# Altium PCB JUNORPCFtoF.PcbDoc
Units mil, origin at the board's own origin, x right, y up, seen from the top; angles counter-clockwise.
Board outline 3407 x 3534 mil, 4 copper layers (Top Layer, Internal Plane 8, Internal Plane 7, Bottom Layer), stack 30.617 mil thick; 35 components, 36 nets, 348 pads, 150 vias.
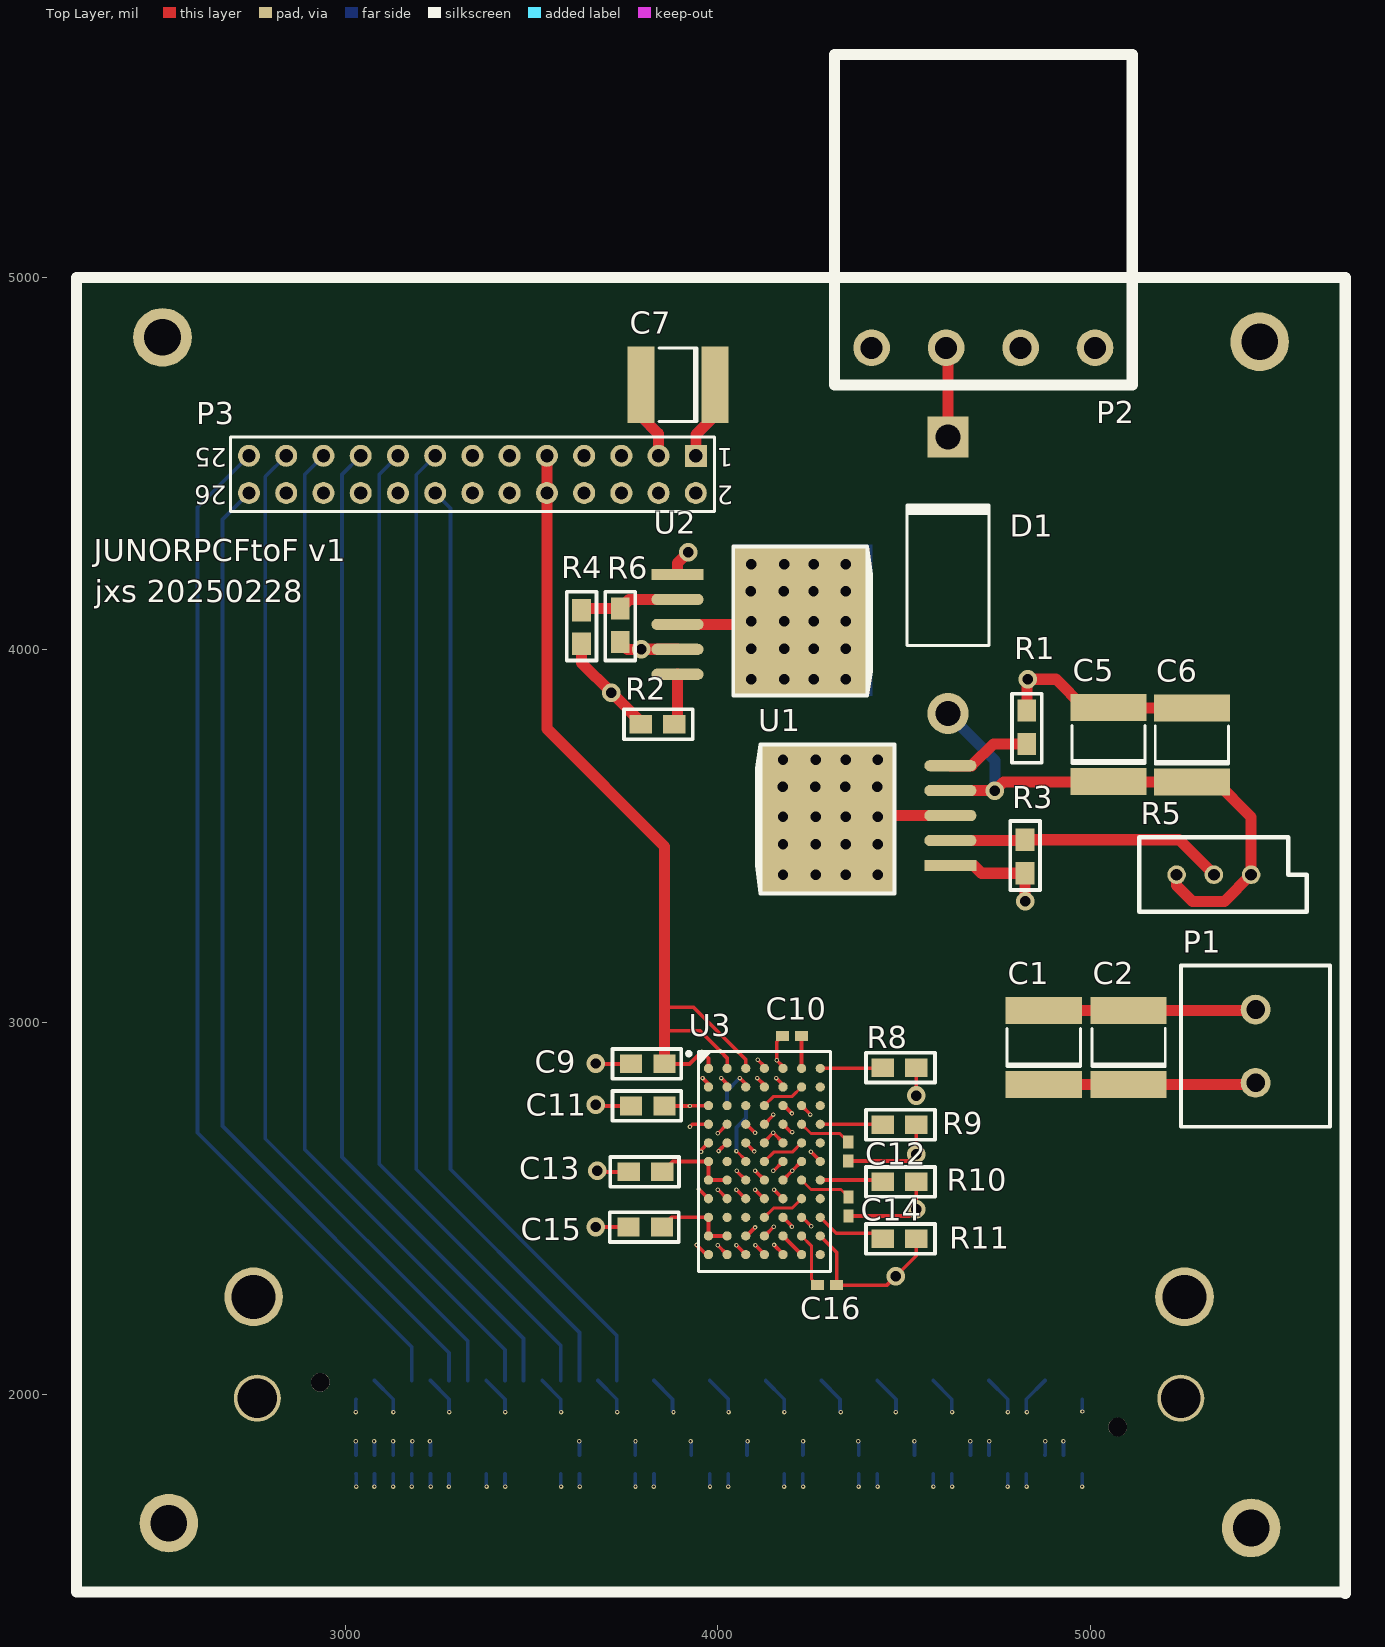
[diagram p0: Top Layer view]
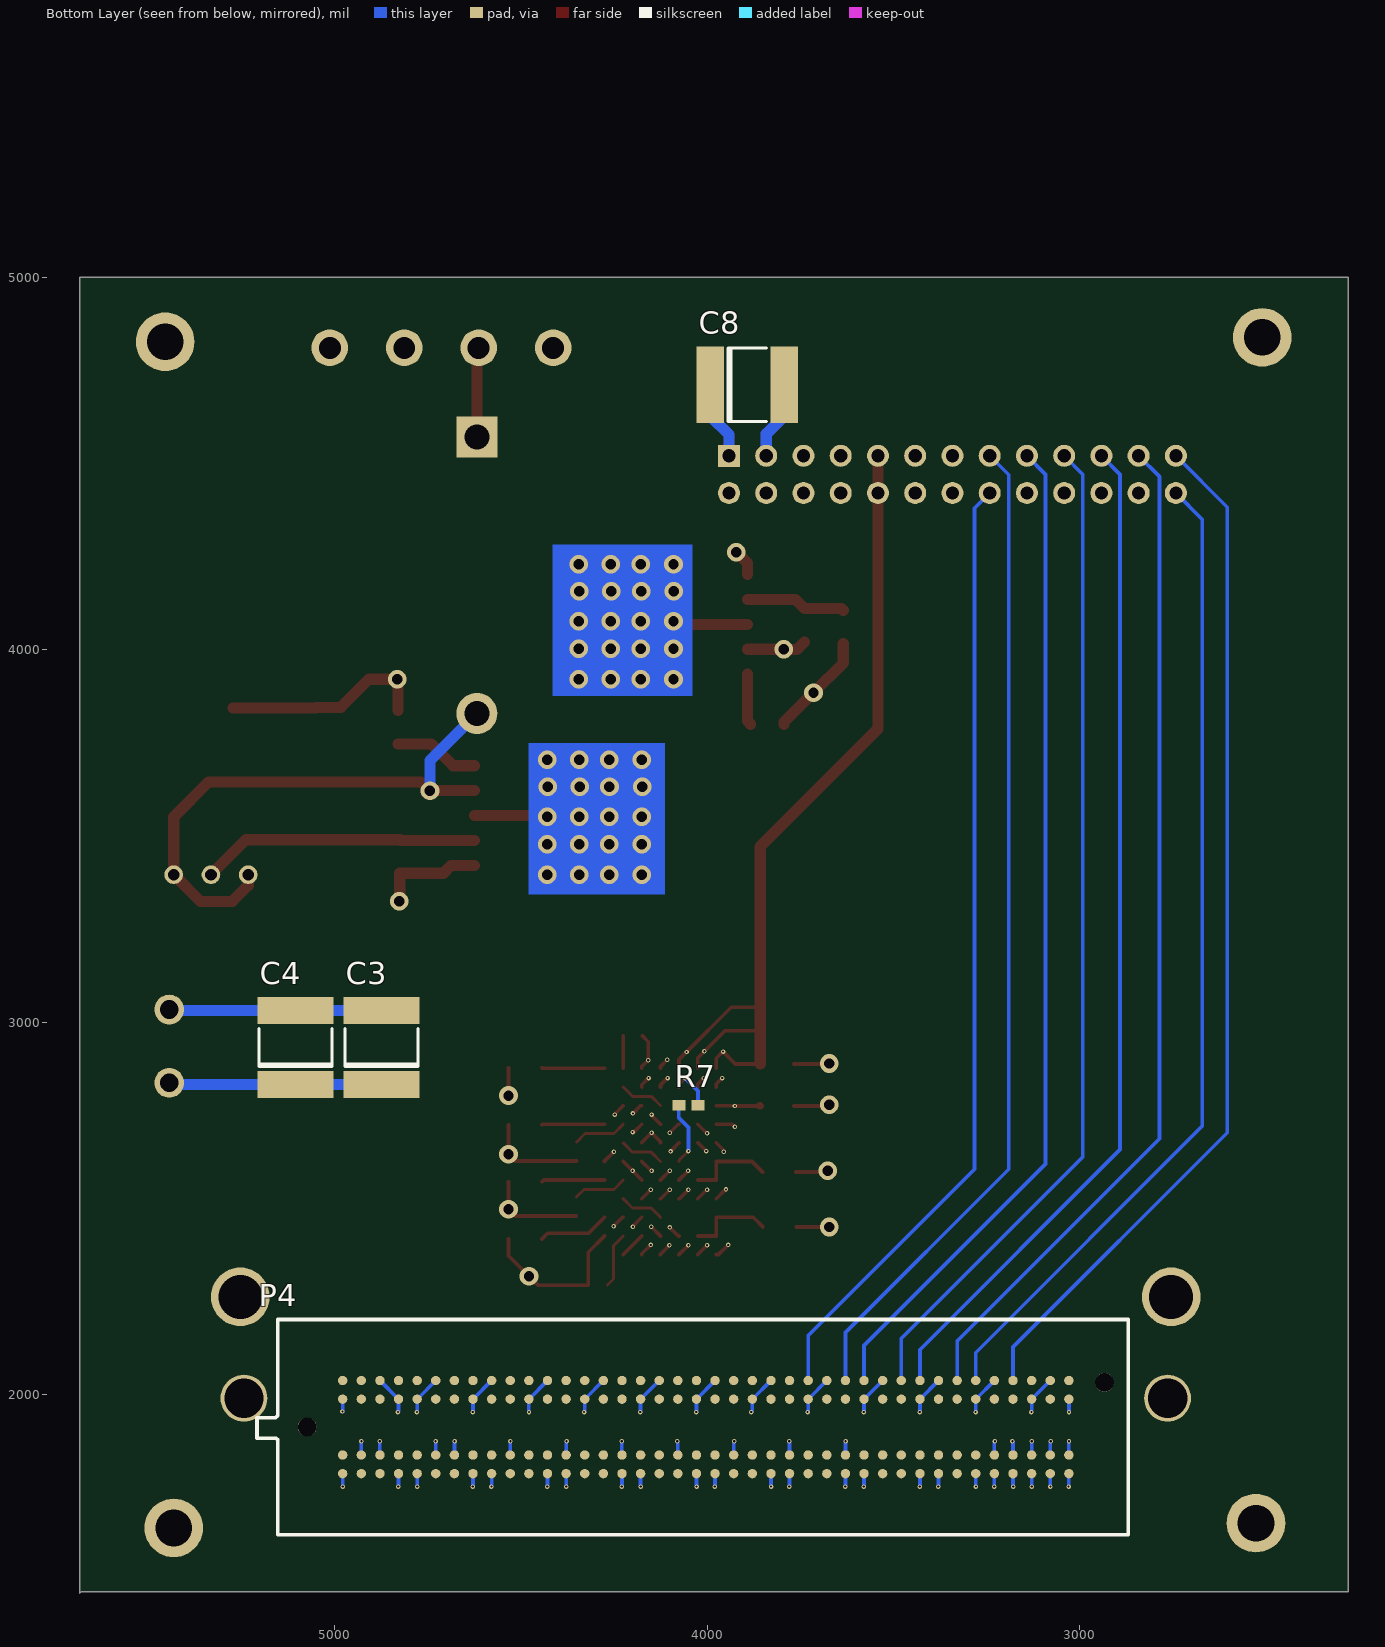
[diagram p1: Bottom Layer view, seen from below]
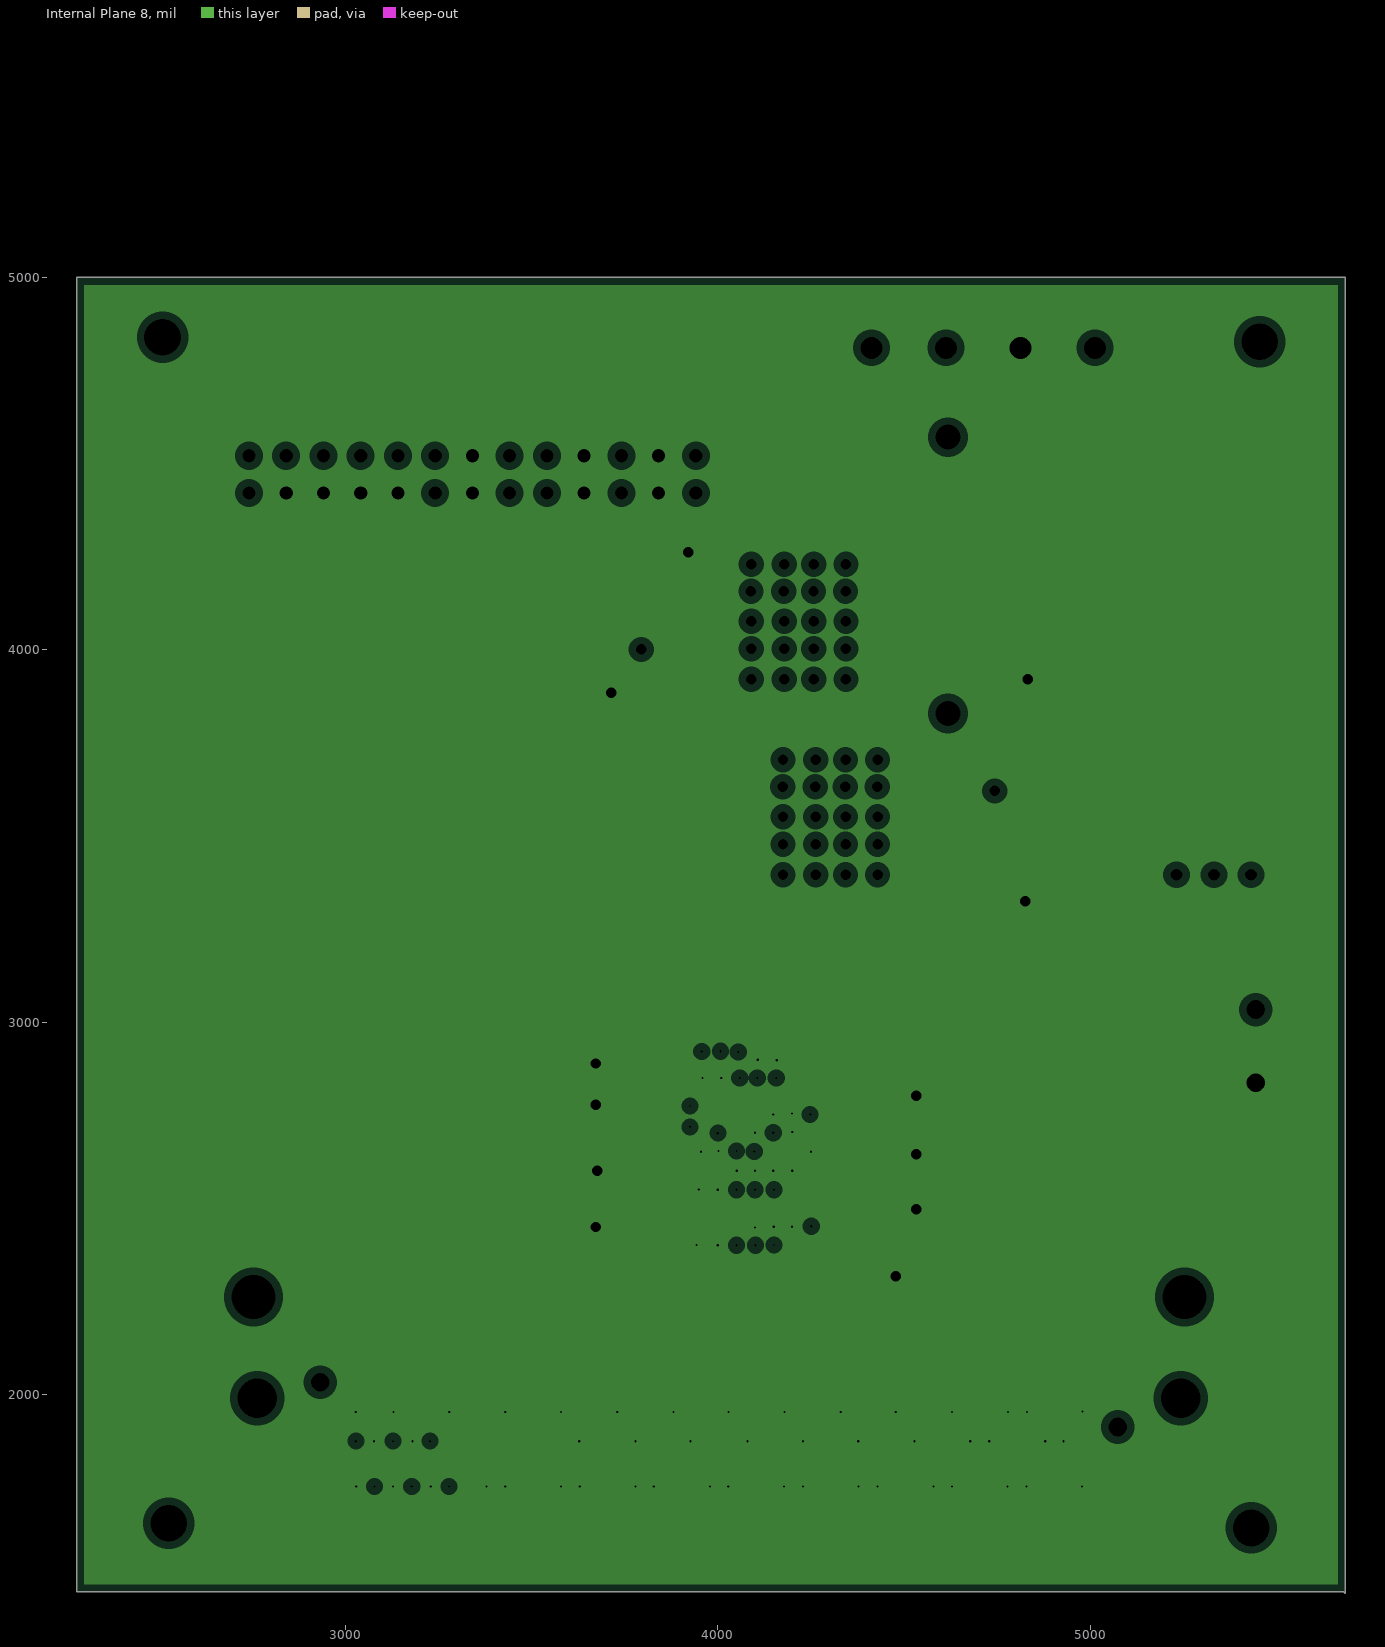
[diagram p2: Internal Plane 8, clearances drawn from the general rule]
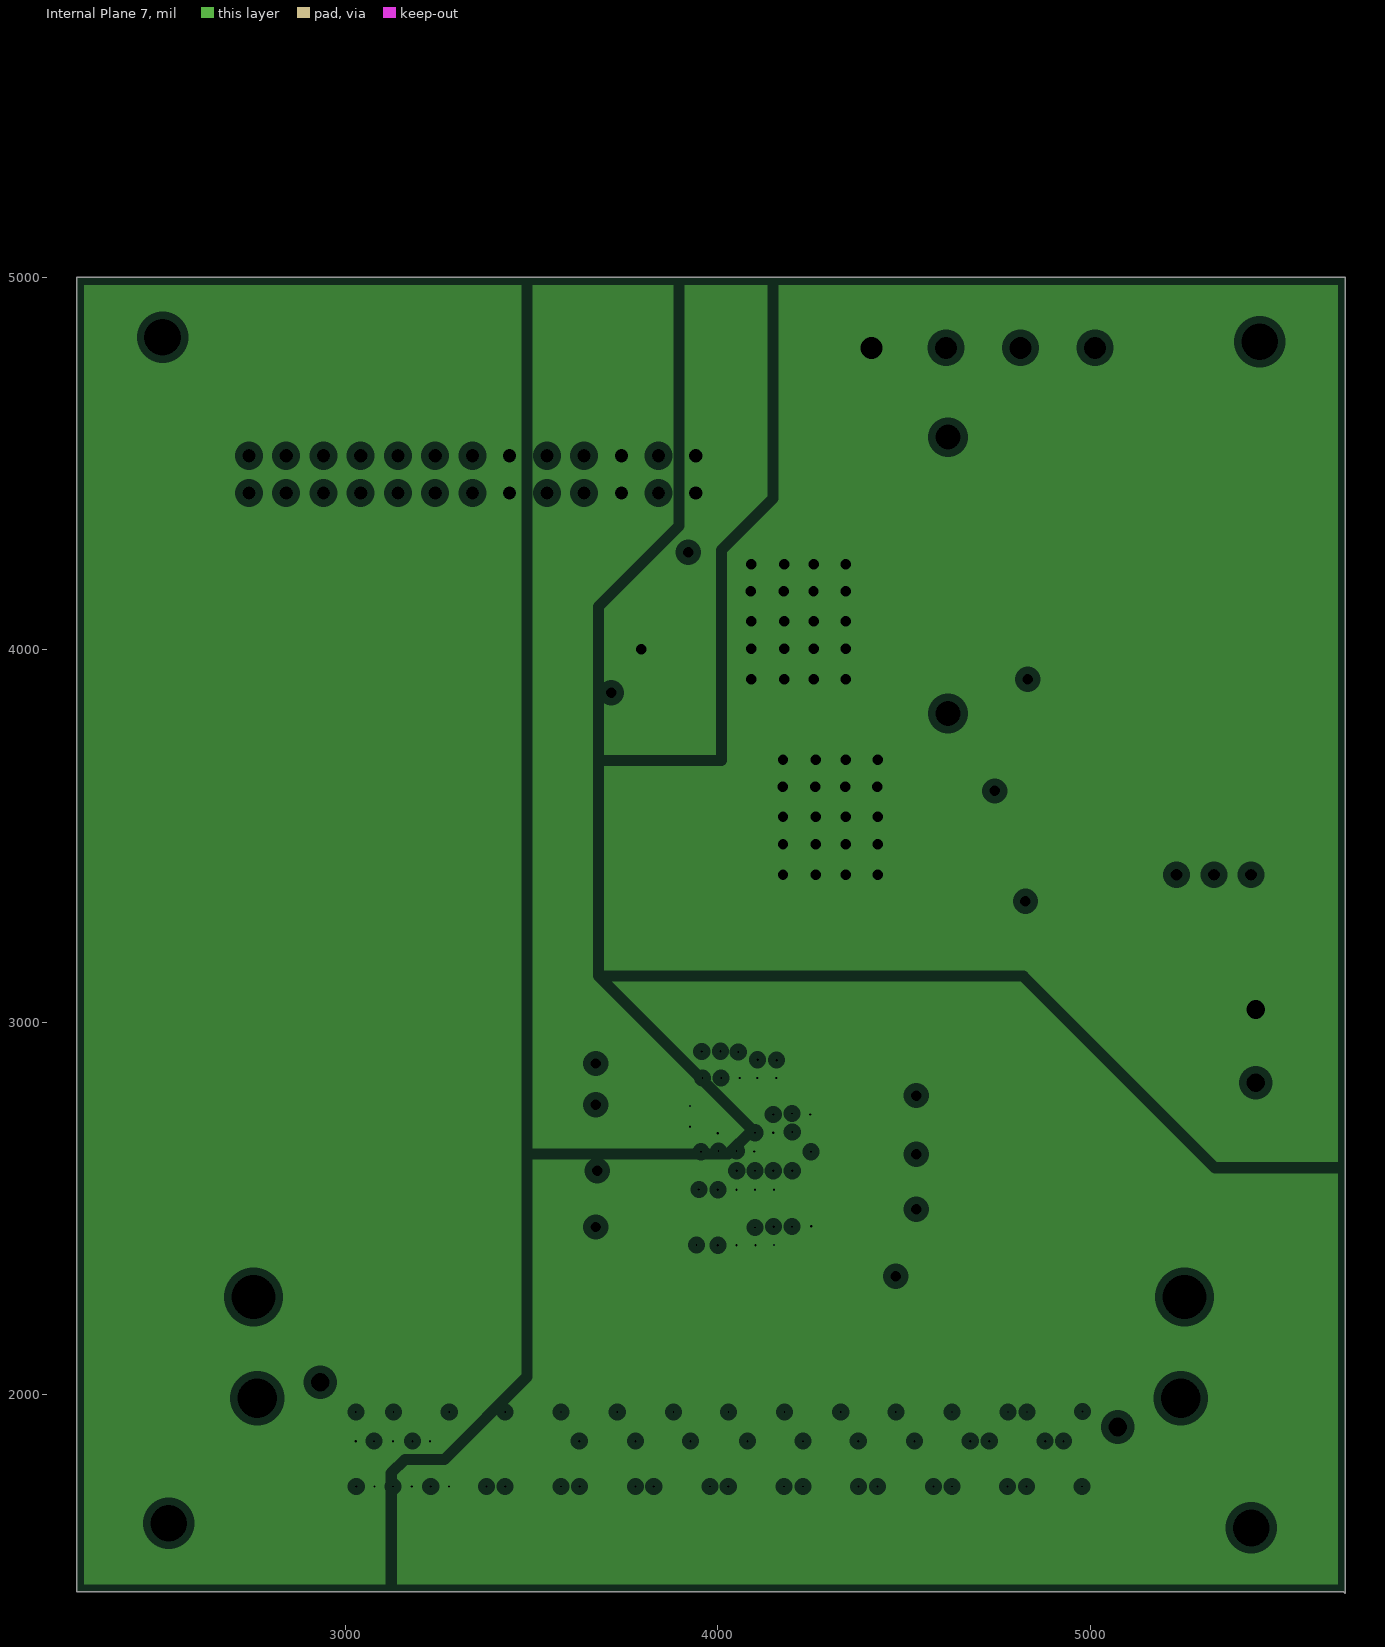
[diagram p3: Internal Plane 7, clearances drawn from the general rule]

## Layer stack, top to bottom
Top Solder: solder mask 0.4, Solder Resist, Dk 3.5
Top Layer: signal copper 1.4
Dielectric 1: core 10, FR-4, Dk 4.2
Internal Plane 8: plane copper 1.417, net GND
Dielectric 7: prepreg 5, Dk 4.2
Internal Plane 7: plane copper 1.4, net +12V
Dielectric6: core 10, FR-4, Dk 4.2
Bottom Layer: signal copper 1.4
Bottom Solder: solder mask 0.4, Solder Resist, Dk 3.5

## Board outline
2278,1470 5681,1470 5685,1466 5685,5000 2278,5000

## Design rules (kind name [scope] priority, off if disabled: settings)
Clearance [All] p1: gap=0 ignorepadtopadclearanceinfootprint=FALSE
ComponentClearance [All] p1: gap=0 collisioncheckmode=3 verticalgap=0 showdistances=FALSE
HoleSize [All] p1: absolutevalues=TRUE maxlimit=200 minlimit=1 maxpercent=80.000 minpercent=20.000
HoleToHoleClearance [All] p1: gap=0 allowstackedmicrovias=TRUE
MinimumSolderMaskSliver [All] p1: minsoldermaskwidth=0
PlaneClearance [All] p1: clearance=20
PlaneConnect [All] p1: planeconnectstyle=Relief reliefexpansion=20 reliefentries=4 reliefconductorwidth=10 reliefairgap=10
PolygonConnect [All] p1: connectstyle=Relief reliefconductorwidth=10 reliefentries=4 polygonreliefangle="90 Angle" airgapwidth=10
RoutingVias [All] p1: holewidth=28 width=50 viastyle="Through Hole" minholewidth=6 minwidth=10 maxholewidth=28 maxwidth=50
SilkToSilkClearance [All] p1: silktosilkclearance=0
SilkToSolderMaskClearance [IsPad] p1: minsilkscreentomaskgap=0 clearancetoexposedcopper=TRUE
SolderMaskExpansion [All] p1: expansion=4
Width [All] p1: maxlimit=100 minlimit=8 preferedwidth=10 minimp=50.000000 maximp=50.000000 favimp=50.000000
22 further rules are at their usual default settings.

## Components (designator, comment, footprint, x,y, rotation, side; value= is the part's Value field where it differs from the comment)
C1 "jc1.0" 2220 4875,2932 r90 top value=47uF@16V
C2 "jc1.0" 2220 5103,2932 r90 top value=4.7uF@16V
C3 "jc1.0" 2220 4874,2932 r90 bottom value=0.1uF@16V
C4 "jc1.0" 2220 5105,2932 r90 bottom value=0.001uF@16V
C5 "jc1.0" 2220 5049,3746 r90 top value=47uF
C6 "jc1.0" 2220 5273,3744 r90 top value=0.1uF
C7 "jc1.0" 2220 3893,4712 r180 top value=47uF
C8 "jc1.0" 2220 3892,4712 r180 bottom value=0.1uF
C9 "jc1.0" 0805 3767,2888 r0 top value=47uF@6.3V
C10 "jc1.0" 0402 4199,2963 r0 top value=0.1uF@6.3V
C11 "jc1.0" 0805 3767,2775 r0 top value=47uF@6.3V
C12 "jc1.0" 0402 4350,2653 r90 top value=0.1uF@6.3V
C13 "jc1.0" 0805 3761,2598 r0 top value=47uF@6.3V
C14 "jc1.0" 0402 4351,2505 r90 top value=0.1uF@6.3V
C15 "jc1.0" 0805 3760,2450 r0 top value=47uF@6.3V
C16 "jc1.0" 0402 4293,2294 r180 top value=0.1uF@6.3V
D1 "Diode 1N5401" DO-201AD 4618,4200 r90 top
P1 "PowerPlug1" POWERPLUG1 5444,3034 r270 top
P2 "PowerPlug3" POWERPLUG3 4413,4811 r0 top
P3 "Header 13X2" HDR2X13 3941,4521 r180 top
P4 "FMC_L_M" ASP-134606-01 5073.62,1912.99 r0 bottom locked
R1 "jr1.0" 0805 4830,3747 r90 top value=4.3kohm
R2 "jr1.0" 0805 3883,3800 r180 top value=4.3kohm
R3 "jr1.0" 0805 4825,3490 r270 top value=2.37kohm
R4 "jr1.0" 0805 3634,4106 r270 top value=2.37kohm
R5 "RPot" VR5 5232,3396 r0 top value=1kohm
R6 "jr1.0" 0805 3738,4021 r90 top value=2.87kohm
R7 "jr1.0" 0402 4050,2777 r0 bottom value=115kohm
R8 "jr1.0" 0805 4533,2878 r180 top value=60.4kohm
R9 "jr1.0" 0805 4533,2724.67 r180 top value=90.9kohm
R10 "jr1.0" 0805 4533,2571.33 r180 top value=90.9kohm
R11 "jr1.0" 0805 4533,2418 r180 top value=60.4kohm
U1 "LT1185CQ" "LP5 - 1185" 4623.94,3420.26 r180 top
U2 "LT1185CQ" "LP5 - 1185" 3892.06,4202.74 r0 top
U3 "LTM4644IY#PBF" BGA77C127P7X11_900X1500X521 4125,2626 r0 top locked

## Footprints (in the part's own frame and the unit in brackets; to place one, negate y for a bottom-side part, rotate by r counter-clockwise, add the part's x,y. Pads: shape width x height; smd on the part's side, far side on the other; paste and mask are expansions set on the pad)
0402 [mm] "Chip Capacitor; Body 1.0 x 0.5 mm (LxW typ)"
  rect 0.9x0.7 smd: 1(-0.65,0) 2(0.65,0)
0805 [mil]
  rect 60x50 smd: 1(0,0) 2(90,0)
  silkscreen extent -50,-40 135,40
2220 [mm] "Chip Capacitor; Body 5.7 x 5.0 mm (LxW typ)"
  rect 1.85x5.2 smd: 1(-2.525,0) 2(2.525,0)
  silkscreen extent -1.3,-2.5 1.3,2.5
ASP-134606-01 [mm]
  round 1.27 hole 1.27: 0(-54.38,-3.05) 0(0,0)
  round 0.64 smd: C1(-2.42,3.18) C2(-3.69,3.18) C3(-4.96,3.18) C4(-6.23,3.18) C5(-7.5,3.18) C6(-8.77,3.18) C7(-10.04,3.18) C8(-11.31,3.18) C9(-12.58,3.18) C10(-13.85,3.18) C11(-15.12,3.18) C12(-16.39,3.18) C13(-17.66,3.18) C14(-18.93,3.18) C15(-20.2,3.18) C16(-21.47,3.18) C17(-22.74,3.18) C18(-24.01,3.18) C19(-25.28,3.18) C20(-26.55,3.18) C21(-27.82,3.18) C22(-29.09,3.18) C23(-30.36,3.18) C24(-31.63,3.18) C25(-32.9,3.18) C26(-34.17,3.18) C27(-35.44,3.18) C28(-36.71,3.18) C29(-37.98,3.18) C30(-39.25,3.18) C31(-40.52,3.18) C32(-41.79,3.18) C33(-43.06,3.18) C34(-44.33,3.18) C35(-45.6,3.18) C36(-46.87,3.18) C37(-48.14,3.18) C38(-49.41,3.18) C39(-50.68,3.18) C40(-51.95,3.18) D1(-2.42,1.91) D2(-3.69,1.91) D3(-4.96,1.91) D4(-6.23,1.91) D5(-7.5,1.91) D6(-8.77,1.91) D7(-10.04,1.91) D8(-11.31,1.91) D9(-12.58,1.91) D10(-13.85,1.91) D11(-15.12,1.91) D12(-16.39,1.91) D13(-17.66,1.91) D14(-18.93,1.91) D15(-20.2,1.91) D16(-21.47,1.91) D17(-22.74,1.91) D18(-24.01,1.91) D19(-25.28,1.91) D20(-26.55,1.91) D21(-27.82,1.91) D22(-29.09,1.91) D23(-30.36,1.91) D24(-31.63,1.91) D25(-32.9,1.91) D26(-34.17,1.91) D27(-35.44,1.91) D28(-36.71,1.91) D29(-37.98,1.91) D30(-39.25,1.91) D31(-40.52,1.91) D32(-41.79,1.91) D33(-43.06,1.91) D34(-44.33,1.91) D35(-45.6,1.91) D36(-46.87,1.91) D37(-48.14,1.91) D38(-49.41,1.91) D39(-50.68,1.91) D40(-51.95,1.91) G1(-2.42,-1.9) G2(-3.69,-1.9) G3(-4.96,-1.9) G4(-6.23,-1.9) G5(-7.5,-1.9) G6(-8.77,-1.9) G7(-10.04,-1.9) G8(-11.31,-1.9) G9(-12.58,-1.9) G10(-13.85,-1.9) G11(-15.12,-1.9) G12(-16.39,-1.9) G13(-17.66,-1.9) G14(-18.93,-1.9) G15(-20.2,-1.9) G16(-21.47,-1.9) G17(-22.74,-1.9) G18(-24.01,-1.9) G19(-25.28,-1.9) G20(-26.55,-1.9) G21(-27.82,-1.9) G22(-29.09,-1.9) G23(-30.36,-1.9) G24(-31.63,-1.9) G25(-32.9,-1.9) G26(-34.17,-1.9) G27(-35.44,-1.9) G28(-36.71,-1.9) G29(-37.98,-1.9) G30(-39.25,-1.9) G31(-40.52,-1.9) G32(-41.79,-1.9) G33(-43.06,-1.9) G34(-44.33,-1.9) G35(-45.6,-1.9) G36(-46.87,-1.9) G37(-48.14,-1.9) G38(-49.41,-1.9) G39(-50.68,-1.9) G40(-51.95,-1.9) H1(-2.42,-3.17) H2(-3.69,-3.17) H3(-4.96,-3.17) H4(-6.23,-3.17) H5(-7.5,-3.17) H6(-8.77,-3.17) H7(-10.04,-3.17) H8(-11.31,-3.17) H9(-12.58,-3.17) H10(-13.85,-3.17) H11(-15.12,-3.17) H12(-16.39,-3.17) H13(-17.66,-3.17) H14(-18.93,-3.17) H15(-20.2,-3.17) H16(-21.47,-3.17) H17(-22.74,-3.17) H18(-24.01,-3.17) H19(-25.28,-3.17) H20(-26.55,-3.17) H21(-27.82,-3.17) H22(-29.09,-3.17) H23(-30.36,-3.17) H24(-31.63,-3.17) H25(-32.9,-3.17) H26(-34.17,-3.17) H27(-35.44,-3.17) H28(-36.71,-3.17) H29(-37.98,-3.17) H30(-39.25,-3.17) H31(-40.52,-3.17) H32(-41.79,-3.17) H33(-43.06,-3.17) H34(-44.33,-3.17) H35(-45.6,-3.17) H36(-46.87,-3.17) H37(-48.14,-3.17) H38(-49.41,-3.17) H39(-50.68,-3.17) H40(-51.95,-3.17)
  silkscreen extent -56,-7.34 3.43,7.34
BGA77C127P7X11_900X1500X521 [mm] "BGA, 77-Leads, Body 9.00x15.00mmx5.21mm, Pitch 1.27mm"
  round 0.63 smd: A1(-3.81,6.35) A2(-2.54,6.35) A3(-1.27,6.35) A4(0,6.35) A5(1.27,6.35) A6(2.54,6.35) A7(3.81,6.35) B1(-3.81,5.08) B2(-2.54,5.08) B3(-1.27,5.08) B4(0,5.08) B5(1.27,5.08) B6(2.54,5.08) B7(3.81,5.08) C1(-3.81,3.81) C2(-2.54,3.81) C3(-1.27,3.81) C4(0,3.81) C5(1.27,3.81) C6(2.54,3.81) C7(3.81,3.81) D1(-3.81,2.54) D2(-2.54,2.54) D3(-1.27,2.54) D4(0,2.54) D5(1.27,2.54) D6(2.54,2.54) D7(3.81,2.54) E1(-3.81,1.27) E2(-2.54,1.27) E3(-1.27,1.27) E4(0,1.27) E5(1.27,1.27) E6(2.54,1.27) E7(3.81,1.27) F1(-3.81,0) F2(-2.54,0) F3(-1.27,0) F4(0,0) F5(1.27,0) F6(2.54,0) F7(3.81,0) G1(-3.81,-1.27) G2(-2.54,-1.27) G3(-1.27,-1.27) G4(0,-1.27) G5(1.27,-1.27) G6(2.54,-1.27) G7(3.81,-1.27) H1(-3.81,-2.54) H2(-2.54,-2.54) H3(-1.27,-2.54) H4(0,-2.54) H5(1.27,-2.54) H6(2.54,-2.54) H7(3.81,-2.54) J1(-3.81,-3.81) J2(-2.54,-3.81) J3(-1.27,-3.81) J4(0,-3.81) J5(1.27,-3.81) J6(2.54,-3.81) J7(3.81,-3.81) K1(-3.81,-5.08) K2(-2.54,-5.08) K3(-1.27,-5.08) K4(0,-5.08) K5(1.27,-5.08) K6(2.54,-5.08) K7(3.81,-5.08) L1(-3.81,-6.35) L2(-2.54,-6.35) L3(-1.27,-6.35) L4(0,-6.35) L5(1.27,-6.35) L6(2.54,-6.35) L7(3.81,-6.35)
  silkscreen extent -5.27,-7.5 4.5,7.5, body extent -4.5,-7.5 4.5,7.5, height 5.21
DO-201AD [mm] "Diode, Axial; Body 9.5 x 5.6 mm (LxDia. max), Lead Dia. 1.32 mm (max)"
  round 2.8 hole 1.7: 1(-9.42,0)
  rect 2.8x2.8 hole 1.7: 2(9.42,0)
  silkscreen extent -4.8,-2.8 4.9,2.8
HDR2X13 [mm] "Connector; Header; 13x2 Position"
  rect 1.5x1.5 hole 0.9: 1(0,0)
  round 1.5 hole 0.9: 2(0,2.54) 3(2.54,0) 4(2.54,2.54) 5(5.08,0) 6(5.08,2.54) 7(7.62,0) 8(7.62,2.54) 9(10.16,0) 10(10.16,2.54) 11(12.7,0) 12(12.7,2.54) 13(15.24,0) 14(15.24,2.54) 15(17.78,0) 16(17.78,2.54) 17(20.32,0) 18(20.32,2.54) 19(22.86,0) 20(22.86,2.54) 21(25.4,0) 22(25.4,2.54) 23(27.94,0) 24(27.94,2.54) 25(30.48,0) 26(30.48,2.54)
  silkscreen extent -1.27,-1.27 31.75,3.81
"LP5 - 1185" [mil]
  rect 354.33x393.7 smd: 0(330.94,-126.74)
  rect 140x30 smd: 1(-0.5,-0.5)
  oval 140x30 smd: 2(-0.5,-67.5) 3(-0.5,-134.5) 4(-0.5,-201.5) 5(-0.5,-268.5)
  silkscreen extent 149,-326 519,75
POWERPLUG1 [mil]
  round 80 hole 50: 1(0,0) 2(196.85,0)
  silkscreen extent -118,-200 315,200
POWERPLUG3 [mm]
  round 2.5 hole 1.5: 1(0,0) 2(5.08,0) 3(10.16,0) 4(15.24,0)
  silkscreen extent -2.54,-2.54 17.78,20
VR5 [mil]
  round 50 hole 32: 1(0,0) 2(200,0) 3(100,0)
  silkscreen extent -100,-100 350,100

## Part data
C1 C2 C3 C4 C5 C6 C7 C8 C9 C10 C11 C12 C13 C14 C15 C16: library part Cap, "Capacitor", LatestRevisionDate=17-Jul-2002, LatestRevisionNote="Re-released for DXP Platform.", PackageReference=RAD-0.3, Published=8-Jun-2000, Publisher="Altium Limited"
D1: "3 Amp General Purpose Rectifier", ComponentLink1Description="Manufacturer Link", ComponentLink1URL=http://www.fairchildsemi.com/, ComponentLink2Description=Datasheet, ComponentLink2URL=http://www.fairchildsemi.com/ds/1N%2F1N5400.pdf, DatasheetVersion=1998, LatestRevisionDate=17-Jul-2002, LatestRevisionNote="Re-released for DXP Platform.", PackageDescription="Diode, Axial; Body 9.5 x 5.6 mm (LxDia. max), Lead Dia. 1.32 mm (max)", PackageReference=DO-201AD, PackageVersion=Aug-1999, Published=8-Jun-2000, Publisher="Altium Limited"
P3: "Header, 13-Pin, Dual row", LatestRevisionDate=17-Jul-2002, LatestRevisionNote="Re-released for DXP Platform.", Publisher="Altium Limited"
R1 R2 R3 R4 R6 R7 R8 R9 R10 R11: library part Res, "Resistor", LatestRevisionDate=04-Mar-2005, LatestRevisionNote="PCB Footprint replaced.", PackageReference=J1-0603, Published=8-Jun-2000, Publisher="Altium Limited"
R5: "Potentiometer", LatestRevisionDate=17-Jul-2002, LatestRevisionNote="Re-released for DXP Platform.", PackageReference=VR5, Published=8-Jun-2000, Publisher="Altium Limited", Set Position=0.5, Sim Note="Enter the Resistance value and the set point into parameter fields."

## Free pads (board coordinates)
  round 157.48 hole 98.43: 0(2509,4839) 0(2526,1655) 0(5432,1642) 0(5455,4827)
  round 157.48 hole 118.11: 2(2753.54,2262.56) 2(5253.19,2262.56)
  round 125.98 hole 105.91: 2(2763.39,1990.51) 2(5243.35,1990.51)

## Via types
v1: diameter 12, hole 6, Top Layer to Bottom Layer, 96 vias
v2: diameter 50, hole 28, Top Layer to Bottom Layer, 54 vias

## Nets (pads, with @x,y where several pads share a name; then routed paths per layer and width w, separated by ;. In a path a pad name is that pad's centre, name@x,y a point inside that pad or via, vN(x,y) a via of type N, cw(c..) or ccw(c..) an arc to the next point about the centre after c; other vN are vias at no path point)
+1.0Vadd: C13.2 U3.F1 U3.G1 U3.G2 | length 235.6
  Top Layer w10: C13.2 3879,2626 U3.F1 U3.G1 U3.G2
+1.2V: C9.2 P3.9 P3.10 U3.A1 U3.A2 U3.A3 | length 2456.2
  Top Layer w10: C9.2 3924,2888 v1(3957,2921) 3975,2903 U3.A1 ; 3857,2977 3952,2977 v1(4007,2922) 4025,2904 U3.A2 ; 3857,3040 3935,3040 v1(4055,2920) 4075,2900 U3.A3
  Top Layer w30: P3.9 P3.10 3541,3788 3857,3472 3857,3040 3857,2977 C9.2
+1.2Vadd: C15.2 U3.J1 U3.K1 U3.K2 | length 235.8
  Top Layer w10: C15.2 3876,2476 U3.J1 U3.K1 U3.K2
+1V: C11.2 P3.5 P3.6 U3.C1 U3.D1 U3.D2 | length 207.7
  Top Layer w10: C11.2 v1(3925,2775) 3926,2776 U3.C1 ; v1(3925,2719) 3932,2726 U3.D1 ; v1(4000,2702) 4001,2702 U3.D2
  Top Layer w20: C11.2 C11.2@3858,2776
+3.3V: P3.11 P3.12 P4.C39 P4.D36 P4.D38 P4.D40 | length 147.4
  Bottom Layer w10: v1(3028,1875) 3028.35,1874.65 P4.D40 ; v1(3078,1753) 3078.35,1753.35 P4.C39 ; v1(3128,1875) 3128.35,1874.65 P4.D38 ; v1(3227,1875) 3228.35,1873.65 P4.D36
+12V: P4.C35 P4.C37 R7.1 U3.B3 U3.B4 U3.B5 U3.C6 U3.E3 U3.E4 U3.E5 U3.H3 U3.H4 U3.H5 U3.J6 U3.L3 U3.L4 U3.L5 | length 637.9
  Top Layer w10: v1(4050,2401) U3.L3 ; v1(4050,2550) 4074,2526 U3.H3 ; v1(4059,2850) 4075,2834 U3.B3 ; U3.E3 v1(4098,2653) ; v1(4100,2550) 4124,2526 U3.H4 ; v1(4101,2401) 4125,2377 U3.L4 ; v1(4106,2850) 4125,2831 U3.B4 ; U3.E4 4125,2679 v1(4149,2703) 4175,2677 U3.E5 ; v1(4151,2402) 4175,2378 U3.L5 ; v1(4151,2550) U3.H5 ; v1(4157,2850) 4175,2832 U3.B5 ; U3.J6 4227,2476 v1(4251,2452) ; U3.C6 4248,2753 v1(4248,2752)
  Bottom Layer w10: v1(3178,1753) 3178.35,1753.35 P4.C37 ; v1(3278,1753) 3278.35,1753.35 P4.C35 ; R7.1 4024.41,2815.41 v1(4059,2850)
-5.2V: C7.1 C8.1 P3.1 P3.2 R6.1 U2.4 | length 586.1
  Top Layer w30: R6.1 3758,4001 v2(3794,4001) 3794.24,4001.24 U2.4 ; P3.1 3941,4578 3992.41,4629.41 C7.1
  Bottom Layer w30: P3.1 3941,4578 3991.41,4628.41 C8.1
CLKIN_LVCMOS33: P3.21 P4.H32 | length 2726.5
  Bottom Layer w10: P3.21 2891,4471 2891,2658 3428.35,2120.65 P4.H32
DATAOUT_LVCMOS33: P3.25 P4.H37 | length 2778.7
  Bottom Layer w10: P3.25 2603,4383 2603,2703 3178.35,2127.65 P4.H37
FBOUT_LVCMOS33: P3.23 P4.H34 | length 2731.5
  Bottom Layer w10: P3.23 2785,4465 2785,2687 3328.35,2143.65 P4.H34
GND: C1.1 C2.1 C3.1 C4.1 C5.2 C6.2 C7.2 C8.2 C9.1 C10.1 C11.1 C12.1 C13.1 C14.1 C15.1 C16.1 P1.2 P2.3 P3.3 P3.4 P3.7 P3.8 P3.13 P3.14 P3.18 P3.20 P3.22 P3.24 P4.C1 P4.C4 P4.C5 P4.C8 P4.C9 P4.C12 P4.C13 P4.C16 P4.C17 P4.C20 P4.C21 P4.C24 P4.C25 P4.C28 P4.C29 P4.C32 P4.C33 P4.C36 P4.C38 P4.C40 P4.D2 P4.D3 P4.D6 P4.D7 P4.D10 P4.D13 P4.D16 P4.D19 P4.D22 P4.D25 P4.D28 P4.D37 P4.D39 P4.G1 P4.G4 P4.G5 P4.G8 P4.G11 P4.G14 P4.G17 P4.G20 P4.G23 P4.G26 P4.G29 P4.G32 P4.G35 P4.G38 P4.G40 P4.H3 P4.H6 P4.H9 P4.H12 P4.H15 P4.H18 P4.H21 P4.H24 P4.H27 P4.H30 P4.H33 P4.H36 P4.H39 R1.2 R2.2 R3.2 R4.2 R8.1 R9.1 R10.1 R11.1 U1.1 U2.1 U3.A4 U3.A5 U3.B1 U3.B2 U3.C5 U3.D3 U3.D4 U3.D5 U3.E1 U3.E2 U3.F5 U3.F6 U3.F7 U3.G3 U3.G4 U3.G5 U3.H1 U3.H2 U3.J5 U3.K3 U3.K4 U3.K7 U3.L1 U3.L2 | length 7672.8
  Top Layer w10: v2(3672,2450) C15.1 ; v2(3672,2778) 3675,2775 C11.1 ; v2(3672,2889) 3673,2888 C9.1 ; v2(3676,2601) 3679,2598 C13.1 ; v1(3943,2402) 3969,2376 U3.L1 ; v1(3949,2551) 3950,2551 U3.H1 ; v1(3955,2652) 3955,2656 U3.E1 ; v1(3959,2850) 3975,2834 U3.B1 ; v1(4000,2401) U3.L2 ; v1(4000,2550) 4001,2550 U3.H2 ; v1(4002,2654) 4024,2676 U3.E2 ; v1(4009,2850) 4025,2834 U3.B2 ; v1(4051,2601) 4051,2600 U3.G3 ; U3.K3 4077,2426 v1(4100,2449) ; U3.D3 4077,2726 v1(4100,2703) ; v1(4100,2601) U3.G4 ; v1(4107,2899) 4125,2881 U3.A4 ; U3.K4 v1(4150,2451) ; U3.D4 4149,2750 v1(4149,2752) ; v1(4149,2601) 4150,2601 U3.F5 ; C10.1 4158,2947.59 v1(4158,2898) 4175,2881 U3.A5 ; U3.J5 4199,2452 v1(4199,2451) ; U3.G5 v1(4200,2601) U3.F6 ; U3.D5 4196,2705 v1(4200,2705) ; U3.C5 4178,2776 v1(4199,2755) ; v1(4250,2652) 4275,2627 U3.F7 ; U3.K7 4319,2382 4319,2294.41 C16.1 4454,2294 v2(4478,2318) 4533,2373 R11.1 ; C12.1 4515.41,2627.41 v2(4533,2645) R9.1 ; C14.1 4514.41,2479.41 v2(4533,2498) R10.1 ; v2(4533,2803) R8.1
  Top Layer w30: R4.2 3634,3965 v2(3714,3885) 3793,3806 R2.2 ; C7.2 3793.59,4627.41 3841,4580 P3.3 ; U2.1 3891.56,4232.56 v2(3921,4262) ; U1.1 4687.24,3420.76 4708,3400 R3.2 4825,3326 v2(4826,3325) ; R1.2 4830,3919 v2(4832,3921) 4908,3921 4983.59,3845.41 C5.2 5051,3843.41 C6.2 ; C1.1 C2.1 5439.44,2832.59 P1.2
  Bottom Layer w10: v1(3028,1953) 3028,1987.45 P4.G40 ; P4.C40 3029,1787.14 v1(3029,1753) ; v1(3077,1875) 3078.35,1873.65 P4.D39 ; P4.H39 P4.G38 3128.35,1953.65 v1(3129,1953) ; v1(3128,1753) 3128.35,1753.35 P4.C38 ; P4.D37 3178.35,1873.35 v1(3180,1875) ; P4.C36 3228.35,1753.65 v1(3229,1753) ; P4.H36 P4.G35 3278.35,1953.65 v1(3279,1953) ; P4.C33 3378.35,1753.65 v1(3379,1753) ; P4.H33 P4.G32 3428.35,1953.65 v1(3429,1953) ; P4.C32 3428.35,1753.65 v1(3429,1753) ; P4.H30 P4.G29 3578.35,1953.65 v1(3579,1953) ; P4.C29 3578.35,1753.65 v1(3579,1753) ; v1(3628,1875) 3628.35,1874.65 P4.D28 ; P4.C28 3628.35,1753.65 v1(3629,1753) ; P4.H27 P4.G26 3728.35,1954.65 v1(3730,1953) ; P4.C25 3778.35,1753.65 v1(3779,1753) ; P4.D25 3778.35,1874.35 v1(3779,1875) ; v1(3828,1753) 3828.35,1753.35 P4.C24 ; P4.H24 P4.G23 3878.35,1955.65 v1(3881,1953) ; v1(3927,1875) 3928.35,1873.65 P4.D22 ; P4.C21 3978.35,1753.65 v1(3979,1753) ; P4.H21 P4.G20 4028.35,1953.65 v1(4029,1953) ; v1(4028,1753) 4028.35,1753.35 P4.C20 ; P4.D19 4078.35,1873.35 v1(4080,1875) ; P4.H18 P4.G17 4178.35,1953.65 v1(4179,1953) ; v1(4178,1753) 4178.35,1753.35 P4.C17 ; P4.C16 4228.35,1753.65 v1(4229,1753) ; P4.D16 4229,1838.45 v1(4229,1875) ; P4.H15 P4.G14 4328.35,1954.65 v1(4330,1953) ; v1(4377,1875) 4378.35,1873.65 P4.D13 ; v1(4378,1753) 4378.35,1753.35 P4.C13 ; P4.C12 4428.35,1753.65 v1(4429,1753) ; P4.H12 P4.G11 4478.35,1953.35 v1(4478,1953) ; v1(4528,1875) 4528.35,1874.65 P4.D10 ; P4.C9 4578.35,1753.65 v1(4579,1753) ; P4.H9 P4.G8 4628.35,1953.65 v1(4629,1953) ; P4.C8 4628.35,1753.65 v1(4629,1753) ; v1(4678,1875) 4678.35,1874.65 P4.D7 ; P4.D6 4728.35,1874.35 v1(4729,1875) ; P4.H6 P4.G5 4778.35,1953.65 v1(4779,1953) ; v1(4778,1753) 4778.35,1753.35 P4.C5 ; P4.C4 4828.35,1753.65 v1(4829,1753) ; v1(4830,1953) 4828.35,1954.65 P4.G4 P4.H3 ; P4.D3 4879,1838.45 v1(4879,1875) ; v1(4928,1875) 4928.35,1874.65 P4.D2 ; v1(4978,1753) 4978.35,1753.35 P4.C1 ; P4.G1 4978.35,1955.31 v1(4979,1954.65)
  Bottom Layer w30: C8.2 3792.59,4628.41 3841,4580 P3.3 ; C3.1 C4.1 5439.44,2832.59 P1.2
NetC5_1: C5.1 C6.1 D1.1 R5.1 R5.2 U1.4 | length 1548.4
  Top Layer w30: U1.4 4743.24,3621.76 v2(4744,3621) 4767.59,3644.59 C6.1 5338.41,3644.59 5432,3551 R5.2 5360,3324 5275,3324 5232,3367 R5.1
  Bottom Layer w30: D1.1 4744,3703.13 v2(4744,3621)
NetC10_2: C10.2 U3.A6 | length 87.2
  Top Layer w10: C10.2 4225,2962.59 U3.A6
NetC12_2: C12.2 U3.D6 | length 144.6
  Top Layer w8: U3.D6 4250,2701 4327.59,2701 C12.2
NetC14_2: C14.2 U3.G6 | length 144.8
  Top Layer w8: U3.G6 4250,2551 4330.59,2551 C14.2
NetC16_2: C16.2 U3.K6 | length 149.6
  Top Layer w8: U3.K6 4251,2400 4251,2310.41 C16.2
NetR1_1: R1.1 U1.5 | length 229.7
  Top Layer w30: U1.5 4681.76,3688.76 4740,3747 R1.1
NetR2_1: R2.1 U2.5 | length 137.8
  Top Layer w30: R2.1 3891.56,3808.56 U2.5
NetR3_1: R3.1 R5.3 U1.2 | length 747.4
  Top Layer w30: U1.2 4822.76,3487.76 R3.1 5238,3490 R5.3
NetR4_1: R4.1 R6.2 U2.2 | length 269.7
  Top Layer w30: R4.1 3639,4111 R6.2 3762.24,4135.24 U2.2
NetR7_2: R7.2 U3.F3 | length 172
  Top Layer w8: v1(4050,2654) 4075,2629 U3.F3
  Bottom Layer w10: v1(4050,2654) 4050,2717 4075.59,2742.59 R7.2
NetR8_2: R8.2 U3.A7 | length 168.8
  Top Layer w10: U3.A7 4441,2876 R8.2
NetR9_2: R9.2 U3.D7 | length 168.6
  Top Layer w10: U3.D7 4441.67,2726 R9.2
NetR10_2: R10.2 U3.G7 | length 169.9
  Top Layer w10: U3.G7 4438.33,2576 R10.2
NetR11_2: R11.2 U3.J7 | length 192
  Top Layer w10: U3.J7 4318,2433 4428,2433 R11.2
NetU3_b6: U3.B6 U3.C4 | length 120.7
  Top Layer w8: U3.C4 4150,2801 4200,2801 U3.B6
NetU3_e6: U3.E6 U3.F4 | length 120.7
  Top Layer w8: U3.F4 4150,2651 4200,2651 U3.E6
NetU3_h6: U3.H6 U3.J4 | length 120.7
  Top Layer w8: U3.J4 4150,2501 4200,2501 U3.H6
NetU3_k5: U3.K5 U3.L6 | length 70.7
  Top Layer w10: U3.K5 U3.L6
RESETIN_LVCMOS33: P3.19 P4.H31 | length 2705.8
  Bottom Layer w10: P3.19 2991,4471 2991,2638 3478.35,2150.65 P4.H31
TCK_LVCMOS33: P3.17 P4.H29 | length 2705.8
  Bottom Layer w10: P3.17 3091,4471 3091,2619 3578.35,2131.65 P4.H29
TDI_LVCMOS33: P3.15 P4.H28 | length 2685.9
  Bottom Layer w10: P3.15 3190,4470 3190,2605 3628.35,2166.65 P4.H28
TESTOUT_LVCMOS33: P3.26 P4.H35 | length 2664.6
  Bottom Layer w10: P3.26 2670,4350 2670,2721 3278.35,2112.65 P4.H35
TMS_LVCMOS33: P3.16 P4.H26 | length 2585.1
  Bottom Layer w10: P3.16 3282,4380 3282,2605 3728.35,2158.65 P4.H26
Vee: C1.2 C2.2 C3.2 C4.2 P1.1 P2.1 U1.0 U1.3 U2.0 U2.3 | length 1539.8
  Top Layer w30: U2.3 4081.24,4068.24 v2(4090,4077) ; v2(4429,3552) 4431.76,3554.76 U1.3 ; C1.2 C2.2 5441.41,3031.41 P1.1
  Bottom Layer w30: C3.2 C4.2 5441.41,3031.41 P1.1
  other v2: 4175,3396 4263,3396 4343,3396 4429,3396 4175,3478 4263,3478 4343,3478 4429,3478 4175,3552 4263,3552 4343,3552 4174,3632 4262,3632 4342,3632 4428,3632 4175,3705 4263,3705 4343,3705 4429,3705 4090,3921 4178,3921 4258,3921 4344,3921 4090,4003 4178,4003 4258,4003 4344,4003 4178,4077 4258,4077 4344,4077 4089,4157 4177,4157 4257,4157 4343,4157 4090,4230 4178,4230 4258,4230 4344,4230
Vth: D1.2 P2.2 | length 242.2
  Top Layer w30: P2.2 4618,4806 D1.2
pads on no net: P2.4 P4.0 P4.C2 P4.C3 P4.C6 P4.C7 P4.C10 P4.C11 P4.C14 P4.C15 P4.C18 P4.C19 P4.C22 P4.C23 P4.C26 P4.C27 P4.C30 P4.C31 P4.C34 P4.D1 P4.D4 P4.D5 P4.D8 P4.D9 P4.D11 P4.D12 P4.D14 P4.D15 P4.D17 P4.D18 P4.D20 P4.D21 P4.D23 P4.D24 P4.D26 P4.D27 P4.D29 P4.D30 P4.D31 P4.D32 P4.D33 P4.D34 P4.D35 P4.G2 P4.G3 P4.G6 P4.G7 P4.G9 P4.G10 P4.G12 P4.G13 P4.G15 P4.G16 P4.G18 P4.G19 P4.G21 P4.G22 P4.G24 P4.G25 P4.G27 P4.G28 P4.G30 P4.G31 P4.G33 P4.G34 P4.G36 P4.G37 P4.G39 P4.H1 P4.H2 P4.H4 P4.H5 P4.H7 P4.H8 P4.H10 P4.H11 P4.H13 P4.H14 P4.H16 P4.H17 P4.H19 P4.H20 P4.H22 P4.H23 P4.H25 P4.H38 P4.H40 U3.B7 U3.C2 U3.C3 U3.C7 U3.E7 U3.F2 U3.H7 U3.J2 U3.J3 U3.L7

## Polygon pours and split planes (outlines as drawn)
GND on Internal Plane 8 (split plane): 5664.9,1490.1 2298.1,1490.1 2298.1,4979.9 5664.9,4979.9
+12V on Internal Plane 7 (split plane): 5324.34,2598.34 5326.63,2596.47 5329.23,2595.07 5332.06,2594.22 5335,2593.93 5664.9,2593.93 5664.9,1490.1 3138.07,1490.1 3138.07,1782.76 3166.24,1810.93 3266,1810.93 3268.94,1811.22 3271.77,1812.07 3274.37,1813.47 3276.66,1815.34 3498.66,2037.34 3500.53,2039.63 3501.93,2042.23 3502.78,2045.06 3503.07,2048 3503.07,2630.93 4028,2630.93 4030.94,2631.22 4033.77,2632.07 4036.37,2633.47 4038.66,2635.34 4103.66,2700.34 4105.53,2702.63 4106.93,2705.23 4107.78,2708.06 4108.07,2711 4107.78,2713.94 4106.93,2716.77 4105.53,2719.37 4103.66,2721.66 3716.39,3108.93 4813.76,3108.93
+3.3V on Internal Plane 7 (split plane): 3472.93,2054.24 3259.76,1841.07 3160,1841.07 3157.06,1840.78 3154.23,1839.93 3151.63,1838.53 3149.34,1836.66 3112.34,1799.66 3110.47,1797.37 3109.07,1794.77 3108.22,1791.94 3107.93,1789 3107.93,1490.1 2298.1,1490.1 2298.1,4979.9 3472.93,4979.9
Vee on Internal Plane 7 (split plane): 5664.9,2624.07 5341.24,2624.07 4830.66,3134.66 4828.37,3136.53 4825.77,3137.93 4822.94,3138.78 4820,3139.07 3695.07,3139.07 3695.07,3398 3695.07,3687.93 4009,3687.93 4011.94,3688.22 4014.77,3689.07 4017.37,3690.47 4019.66,3692.34 4020.66,3693.34 4022.53,3695.63 4023.93,3698.23 4024.78,3701.06 4025.07,3704 4025.07,4261.76 4158.66,4395.34 4160.53,4397.63 4161.93,4400.23 4162.78,4403.06 4163.07,4406 4163.07,4979.9 5664.9,4979.9
+1V on Internal Plane 7 (split plane): 3880.93,4338.24 3669.34,4126.66 3667.47,4124.37 3666.07,4121.77 3665.22,4118.94 3664.93,4116 3664.93,3398 3664.93,3124 3665.22,3121.06 3666.07,3118.23 3667.47,3115.63 3669.34,3113.34 4071.68,2711 4021.76,2661.07 3503.07,2661.07 3503.07,4979.9 3880.93,4979.9
-5.2V on Internal Plane 7 (split plane): 4132.93,4412.24 3999.34,4278.66 3997.47,4276.37 3996.07,4273.77 3995.22,4270.94 3994.93,4268 3994.93,3718.07 3695.07,3718.07 3695.07,4109.76 3906.66,4321.34 3908.53,4323.63 3909.93,4326.23 3910.78,4329.06 3911.07,4332 3911.07,4979.9 4132.93,4979.9

## Other copper
Bottom Layer:
  rectangle net Vee: 4113,3343 4479,3750
  rectangle net Vee: 4039,3876 4415,4283
Internal Plane 7 (plane layer: these items are gaps in the copper):
  lines w30: 3124,1468 3123,1469 3123,1789 3160,1826 3266,1826 3488,2048 3488,5000 ; 3492,2646 4028,2646 4093,2711 3680,3124 ; 3684,3703 4009,3703 4010,3704 4010,4268 4148,4406 4148,5000 ; 3896,5000 3896,4332 3680,4116 3680,3398 3680,3124 ; 5693,2609 5335,2609 4820,3124 3680,3124

## Silkscreen, mask and mechanical layers (free items; w line width, h text height)
Top Overlay:
  the board outline again, w30
  text "JUNORPCFtoF v1" at 2324,4238 h60
  text "jxs 20250228" at 2327,4127 h60
Top Paste:
  rectangle: 4115,3345 4473,3745
  rectangle: 4045,3873 4407,4275
Top Solder:
  rectangle: 4113,3345 4476,3750
  rectangle: 4041,3876 4403,4277

## Text inside footprints (layer, text, board x,y; h text height)
P3: Top Overlay "2" at 4041,4441 h50 r180; Top Overlay "1" at 4041,4541 h50 r180; Top Overlay "25" at 2681,4541 h50 r180; Top Overlay "26" at 2681,4441 h50 r180